# Altium PCB M_ST_Link.PcbDoc
Units mil, origin at the board's own origin, x right, y up, seen from the top; angles counter-clockwise.
Board outline 80.7 x 10.03 mil, 2 copper layers (Top Layer, Bottom Layer), stack 62.8 mil thick; 23 components, 23 nets, 123 pads, 27 vias.
Unrouted connection lines stored in the file: 4.
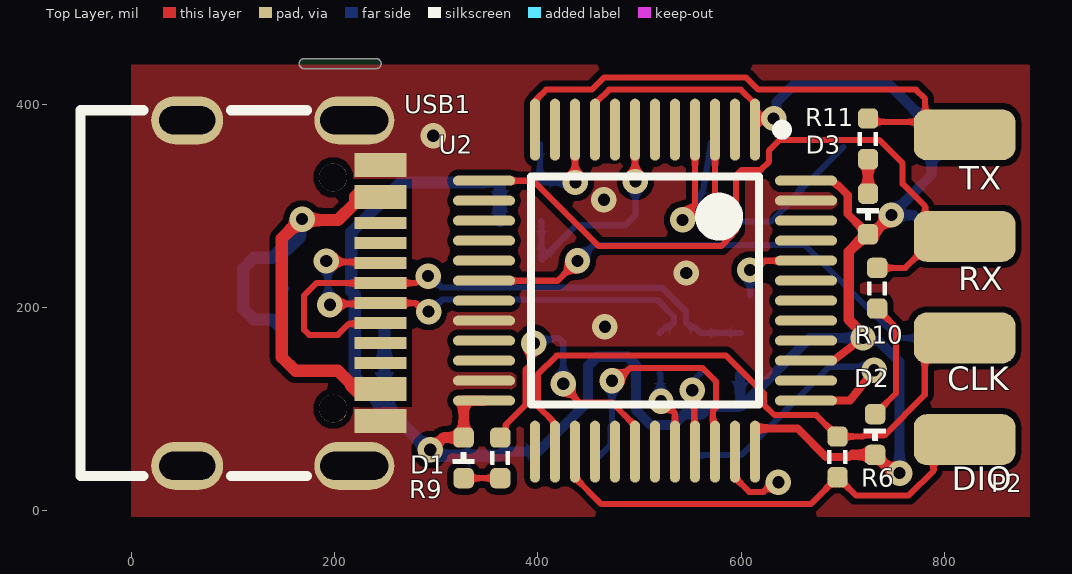
[diagram p0: Top Layer view]
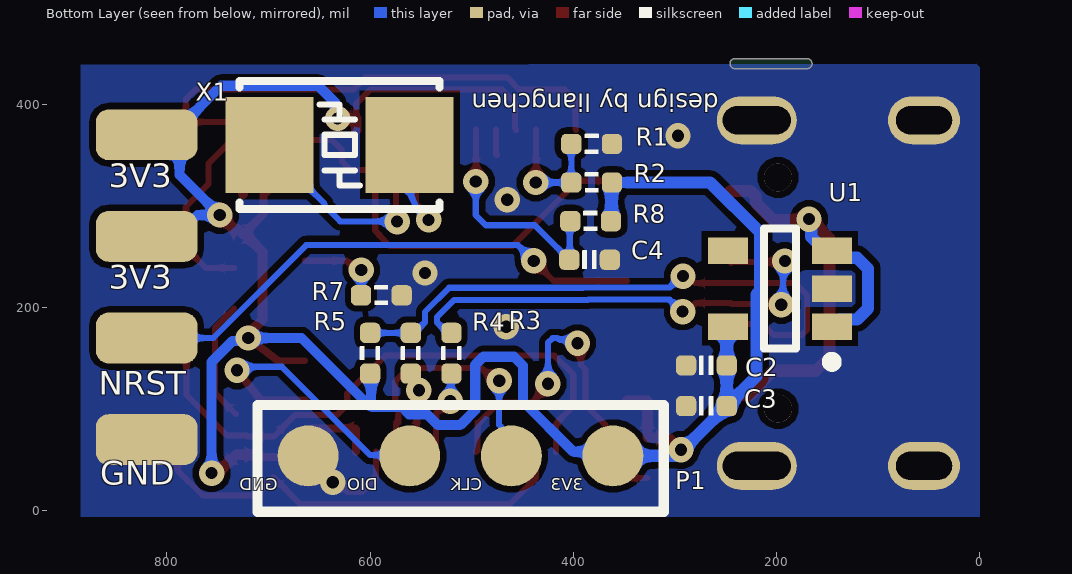
[diagram p1: Bottom Layer view, seen from below]

## Layer stack, top to bottom
Top Solder: solder mask 0.4, Solder Resist, Dk 3.5
Top Layer: signal copper 1.4
Dielectric 1: dielectric 60, FR-4, Dk 4.8
Bottom Layer: signal copper 1.4
Bottom Solder: solder mask 0.4, Solder Resist, Dk 3.5

## Board outline
170.06,434.99 cw(c170.06,440) 170.06,445.01 240.75,445.01 cw(c240.75,440) 245.76,440 cw(c240.75,440) 240.75,434.99

## Design rules (kind name [scope] priority, off if disabled: settings)
Clearance [All] p1: gap=6 ignorepadtopadclearanceinfootprint=FALSE except(0: Arc-Hole Track-Hole SMDPad-Hole THPad-Hole Via-Hole Fill-Hole Poly-Hole Region-Hole Text-Hole)
DiffPairsRouting DiffPair_90DiffPairsRouting [InDifferentialPairClass('90oum')] p1: maxlimit=6 minlimit=6 mostfreqgap=6 toplayer_minwidth=6 toplayer_maxwidth=6 toplayer_prefwidth=6 bottomlayer_minwidth=6 bottomlayer_maxwidth=6 bottomlayer_prefwidth=6 maxuncoupledlength=500
DiffPairsRouting [All] p2: maxlimit=6 minlimit=6 mostfreqgap=6 toplayer_minwidth=6 toplayer_maxwidth=6 toplayer_prefwidth=6 bottomlayer_minwidth=6 bottomlayer_maxwidth=6 bottomlayer_prefwidth=6 maxuncoupledlength=500
MatchedLengths DiffPair_90MatchedLengths [InDifferentialPairClass('90oum')] p1: tolerance=10 checknetsindiffpair=FALSE checkdiffpairvsdiffpair=TRUE checkxsignals=TRUE checkothers=TRUE
PolygonConnect [All] p1: connectstyle=Direct reliefconductorwidth=10 reliefentries=4 polygonreliefangle="90 Angle" airgapwidth=10
RoomDefinition Main [InComponentClass('Main')] p1: confinementstyle=ConfineIn formatcopy=TRUE lockcomponents=FALSE outline -2900,-2475 -900,-2475 -900,-1475 -2900,-1475
RoutingVias [All] p1: holewidth=28 width=50 viastyle="Through Hole" minholewidth=28 minwidth=50 maxholewidth=28 maxwidth=50
SolderMaskExpansion [All] p1: expansion=4 istentingtop=FALSE
Width [All] p1: maxlimit=50 minlimit=6 preferedwidth=10 minimp=50.000000 maximp=50.000000 favimp=50.000000
29 further rules are at their usual default settings.

## Components (designator, comment, footprint, x,y, rotation, side; value= is the part's Value field where it differs from the comment)
C2 "0.1uF" CAP_0402 269,143 r180 bottom value=0.1u
C3 "0.1uF" CAP_0402 269,103 r180 bottom value=0.1u
C4 "0.1uF" CAP_0402 384,247 r0 bottom value=0.1u
D1 "color?" LED_0402_BLUE 327,52 r90 top
D2 "color?" LED_0402_BLUE 732,75 r270 top
D3 "color?" LED_0402_BLUE 725,292 r270 top
P1 "Header 4" TP-2.54-4P 361,54 r180 bottom
P2 "Header 4X2" HDR2X4_2.54_180H 820,370 r0 top
R1 "10K" RES_0402 382,361 r0 bottom value=22R
R2 "10K" RES_0402 382,323 r180 bottom value=22R
R3 "22R" RES_0402 520,155 r270 bottom
R4 "22R" RES_0402 560,155 r270 bottom
R5 "1.5K" RES_0402 600,155 r90 bottom value=22R
R6 "100R" RES_0402 695,53 r90 top value=22R
R7 "10K" RES_0402 589,212 r180 bottom value=22R
R8 "10K" RES_0402 383,285 r180 bottom value=22R
R9 "2K" RES_0402 363,52 r270 top value=22R
R10 "680R" RES_0402 734,219 r270 top value=22R
R11 "680R" RES_0402 725,366 r270 top value=22R
U1 "MIC5504-3.3YM5-TR" MCHP-SOT-23-M5_V 196.82,218.6 r0 bottom
U2 "STM32F103CBT6" STM-LQFP48_L 505.47,216.54 r270 top
USB1 "KH-TYPE-C-16P" TYPE-C-SMD-16P-TOP 149.92,214.2 r270 top
X1 "XTAL-2P" "OSC 5032-2P" 630,360 r0 bottom

## Footprints (in the part's own frame and the unit in brackets; to place one, negate y for a bottom-side part, rotate by r counter-clockwise, add the part's x,y. Pads: shape width x height; smd on the part's side, far side on the other; paste and mask are expansions set on the pad)
CAP_0402 [mil]
  rrect50% 20x20 smd: 1(-20,0) 2(20,0)
  silkscreen extent -7,-9 7,9, body extent -20,-10 20,10, height 20
HDR2X4_2.54_180H [mil]
  rrect50% 100x50 smd: 1(0,0) 3(0,-100) 5(0,-200) 7(0,-300)
  rrect50% 100x50 smd far side: 2(0,0) 4(0,-100) 6(0,-200) 8(0,-300)
  body extent -38,-350 415,50, height 100
LED_0402_BLUE [mil]
  rrect50% 20x20 smd: 1(-20,0) 2(20,0)
  silkscreen extent -6,-10 6,10, body extent -20,-10 20,10, height 18
MCHP-SOT-23-M5_V [mm] "SOT-23, 5-Leads, Body 3x1.7mm, Pitch 0.95mm"
  rect 1x0.66 smd: 1(-1.3,0.95) 2(-1.3,0) 3(-1.3,-0.95) 4(1.3,-0.95) 5(1.3,0.95)
  silkscreen extent -1.42,-1.5 0.4,1.95, body extent -1.5,-1.5 1.5,1.5, height 1.45
"OSC 5032-2P" [mm]
  rect 2.2x2.4 smd: 1(-1.75,0) 2(1.75,0)
  silkscreen extent -2.5,-1.6 2.5,1.6, body extent -2.5,-1.52 2.5,1.68, height 0.86
RES_0402 [mil]
  rrect50% 20x20 smd: 1(-20,0) 2(20,0)
  silkscreen extent -6,-10 6,10, body extent -20,-10 20,10, height 14
STM-LQFP48_L [mm] "QFP, 48-Leads, Body 7x7mm, Pitch 0.5mm, IPC High Density"
  oval 1.55x0.25 smd: 1(-4.025,2.75) 2(-4.025,2.25) 3(-4.025,1.75) 4(-4.025,1.25) 5(-4.025,0.75) 6(-4.025,0.25) 7(-4.025,-0.25) 8(-4.025,-0.75) 9(-4.025,-1.25) 10(-4.025,-1.75) 11(-4.025,-2.25) 12(-4.025,-2.75) 25(4.025,-2.75) 26(4.025,-2.25) 27(4.025,-1.75) 28(4.025,-1.25) 29(4.025,-0.75) 30(4.025,-0.25) 31(4.025,0.25) 32(4.025,0.75) 33(4.025,1.25) 34(4.025,1.75) 35(4.025,2.25) 36(4.025,2.75)
  oval 0.25x1.55 smd: 13(-2.75,-4.025) 14(-2.25,-4.025) 15(-1.75,-4.025) 16(-1.25,-4.025) 17(-0.75,-4.025) 18(-0.25,-4.025) 19(0.25,-4.025) 20(0.75,-4.025) 21(1.25,-4.025) 22(1.75,-4.025) 23(2.25,-4.025) 24(2.75,-4.025) 37(2.75,4.025) 38(2.25,4.025) 39(1.75,4.025) 40(1.25,4.025) 41(0.75,4.025) 42(0.25,4.025) 43(-0.25,4.025) 44(-0.75,4.025) 45(-1.25,4.025) 46(-1.75,4.025) 47(-2.25,4.025) 48(-2.75,4.025)
  silkscreen extent -4.15,-2.85 2.85,3.55, body extent -3.5,-3.5 3.5,3.5, height 1.6
TP-2.54-4P [mil] "Connector; Header; 4 Position"
  round 60 smd: 1(0,0) 2(-100,0) 3(-200,0) 4(-300,0)
  silkscreen extent -350,-55 50,50
TYPE-C-SMD-16P-TOP [mm]
  oval 1.2x2 hole 0.7 slot 1.7 at 90 deg: 1(-4.32,1.765) 2(4.32,1.765)
  oval 1.2x1.8 hole 0.7 slot 1.4 at 90 deg: 3(-4.32,-2.415) 4(4.32,-2.415)
  rect 0.3x1.3 smd: A1(-3.35,2.415) A4(-2.55,2.415) A5(-1.25,2.415) A6(-0.25,2.415) A7(0.25,2.415) A8(1.25,2.415) A9(2.55,2.415) A12(3.35,2.415) B1(3.05,2.415) B4(2.25,2.415) B5(1.75,2.415) B6(0.75,2.415) B7(-0.75,2.415) B8(-1.75,2.415) B9(-2.25,2.415) B12(-3.05,2.415)
  round 0.7 hole 0.7 unplated: ""(-2.89,1.235) ""(2.89,1.235)
  silkscreen extent -4.57,-5.08 4.57,0.57, body extent -4.47,-5.01 4.47,2.89, height 3.13

## Part data
C2 C3 C4: library part 电容-0402, "Capacitor"
D1 D2 D3: library part LED_0402, "LED", Type=0402
P1: "Header, 4-Pin", LatestRevisionDate=17-Jul-2002, LatestRevisionNote="Re-released for DXP Platform.", Publisher="Altium Limited"
P2: "Header, 4-Pin, Dual row", LatestRevisionDate=17-Jul-2002, LatestRevisionNote="Re-released for DXP Platform.", Publisher="Altium Limited"
R1 R2 R3 R4 R5 R6 R7 R8 R9 R10 R11: library part 电阻-0402, "Resistor"
U1: library part CMP-2000-07604-1, "Single LDO, 2.5 to 5.5 V, Fixed Out 3.3 V, 0.3 A, -40 to 125 degC, 5-Pin SOT-23 (M5), RoHS, Tape and Reel", Case\/Package=SOT-23, Dropout Voltage=160mV, Manufacturer=Microchip, Max Input Voltage=5.5V, Max Operating Temperature=125degC, Min Current Limit=400mA, Min Input Voltage=2.5V, Min Operating Temperature=-40degC, Nominal Output Voltage=3.3V, Output Current=300mA, Package Description="5-Pin Small Outline Transistor, Body 1.6 x 2.9 mm, Pitch 0.95 mm", Datasheet URL=http://ww1.microchip.com/downloads/en/DeviceDoc/MIC550X.pdf, Datasheet Version="Rev. 2.3, 04/2015", Lead Free=LeadFree, Manufacturer URL=http://www.microchip.com/, Mount=SurfaceMount, Mounting Technology=SurfaceMount, Number of Pins=5, Number of Regulators=1, Output Voltage=3.3V, Package Reference=SOT-23, Packaging=CutTape, REACH SVHC=NoSVHC, RoHSCompliant=True
U2: library part CMP-0237-00250-3, "ARM Cortex-M3 32-bit MCU, 128 KB Flash, 20 KB Internal RAM, 37 I/Os, 48-pin LQFP, -40 to 85 degC, Tray", I/Os (High Current)=37, Operating Frequency(F) (Processor speed) (MHz)=72, Supply Voltage(Vcc) min (V)=2, A/D Converter="2x12-bit (10 Channel)", ComponentLink1Description="Manufacturer URL", ComponentLink1URL=http://www.st.com/web/en/home.html, ComponentLink2Description=Datasheet, ComponentLink2URL=http://www.st.com/st-web-ui/static/active/en/resource/technical/document/datasheet/CD00161566.pdf, ComponentLink3Description="Package Specification", ComponentLink3URL=http://www.st.com/st-web-ui/static/active/en/resource/technical/document/datasheet/DM00058181.pdf, Core="ARM Cortex-M3", DatasheetVersion="Rev. 16", FLASH Size (Prog) (kB)=128, Internal RAM Size (kB)=20, Mounting Technology="Surface Mount", PackageDescription="48-Pin Low Profile Quad Flat Package, 7 x 7 mm Body, 0.5 mm Pitch", PackageReference=LQFP48, PackageVersion="Rev. 6, 06/2013", Packing=Tray, PartNumber=STM32F103CBT6
USB1: BOM_JLCPCB Part Class="Extended Part", BOM_Manufacturer="Shenzhen Kinghelm Elec", BOM_Manufacturer Part=KH-TYPE-C-16P, BOM_Supplier=LCSC, BOM_Supplier Part=C709357, Contributor=LCSC, spicePre=U, spiceSymbolName=KH-TYPE-C-16P
X1: "2脚无源脚晶振"

## Via types
v1: diameter 25, hole 12, Top Layer to Bottom Layer, 27 vias

## Nets (pads, with @x,y where several pads share a name; then routed paths per layer and width w, separated by ;. In a path a pad name is that pad's centre, name@x,y a point inside that pad or via, vN(x,y) a via of type N, cw(c..) or ccw(c..) an arc to the next point about the centre after c; other vN are vias at no path point)
3V3: C2.2 C3.2 D1.2 D2.2 D3.2 P1.1 P2.2 P2.4 R2.2 R5.1 R8.2 U1.5 U2.1 U2.9 U2.24 U2.36 U2.39 U2.48 | length 2448.5
  Top Layer w6: U2.9 457.51,376.25 457.51,401.85 470.18,414.51 599.82,414.51 613.74,400.59 U2.1@613.74,385.92
  Top Layer w8: U2.36 613.74,80.15 614.59,81 655.79,81 683.79,53 706.21,53 708.21,55 709.63,55 ; U2.48 690.03,324.8 694.79,320.04 695.71,320.04 705,310.75 705,292 724,273 D3.2
  Top Layer w10: v1(294,60) 294.79,60 306.79,72 D1.2 327,108.19 327.08,108.27 U2.24 ; U2.1 613.74,385.92 613.82,386 v1(632,386) ; 709.63,55 D2.2 v1@747.13,39.87 ; v1(720,170) 720,174.06 706,188.06 706,255 724,273 724.99,273.99 D3.2@726.93,273.99 ; D3.2 730,277 734,277 v1(748,291)
  Bottom Layer w10: 347,323 R2.2 ; P1.1 365.14,58.14 400.14,58.14 449.5,107.5 449.5,142.64 458.36,151.5 488.5,151.5 496.5,143.5 496.5,99.18 511.44,84.25 533.26,84.25 544.02,95 561.7,95 568.7,102 598,102 599,103 ; R5.1 599,134 599,103 ; v1(632,386) 634.84,388.84 634.84,402.05 651.03,418.24 746.76,418.24 795.01,370 806.93,370 787.5,350.57 787.5,330.5 768.48,311.48 v1(748,291) 769.94,291 790.94,270 P2.4 ; v1(756,37) 756,146.48 735.35,167.13 722.87,167.13 v1(720,170) 667.63,170 600.63,103 599,103
  Bottom Layer w12: U1.5 249,180.2 C2.2 C3.2 ; 347,323 265.35,323 216.31,273.96 216.31,216.36 219.77,212.9 219.77,132.23 C3.2 ; P1.1 298,54 C3.2 ; R2.2 362.5,322.5 362.5,285.5 R8.2
5V: U1.1 U1.3 USB1.A4 USB1.A9 USB1.B4 USB1.B9 | length 522.5
  Top Layer w12: v1(168,287) 167,287 v1@166,286 ; USB1.A9 225.5,113.8 215.45,123.84 215.45,125.62 203.41,137.66 161.34,137.66 148,151 148,268 v1@166,286 ; USB1.A4 225.51,314.59 220.19,309.27 220.19,302.78 203.41,286 v1@166,286
  Bottom Layer w12: U1.1 138.65,188.19 120.74,188.19 109.95,198.98 109.95,238.22 120.74,249.01 138.65,249.01 U1.3 152.33,256 165.84,269.51 165.84,284.84 v1(168,287)
GND: C2.1 C3.1 C4.1 P1.4 P2.8 R1.1 R7.2 U1.2 U2.8 U2.20 U2.23 U2.35 U2.47 USB1.1 USB1.2 USB1.3 USB1.4 USB1.A1 USB1.A12 USB1.B1 USB1.B12 | length 110.1
  Top Layer w6: U2.8@475,350 475.94,350.94 U2.8 ; U2.35 594.06,32.48 607.97,18.56 622.1,18.56 631.6,28.06 v1(636.74,28.06)
  Bottom Layer w6: U1.2 U1.2@152.33,218.6
  other v1: 466,181 546,234 465,306 297,369
JTCK: P2.5 R6.2 U2.26 | length 610.5
  Top Layer w6: U2.26 416.89,84.7 414.97,86.62 414.97,88.03 400.1,102.9 400.1,134.1 418.58,152.58 585.32,152.58 622.5,115.41 622.5,104.43 632.93,94 674,94 R6.2 720.2,73 721.2,74 740.8,74 780.8,114 780.8,148.72 802.07,170 P2.5
JTMS: P2.7 R6.1 U2.27 | length 466.3
  Top Layer w6: U2.27 436.57,32.48 462.49,6.56 668.56,6.56 R6.1 713,15 765,15 789.51,39.51 789.51,48.72 810.79,70 P2.7
LED_RUN: R9.1 U2.30 | length 294.7
  Top Layer w6: R9.1 368.41,77.41 368.41,84.39 388.1,104.08 388.1,139.07 392.44,143.41 392.44,161.45 v1(395.89,164.91) ; v1(425,125) 425,122.65 441.15,106.5 472.79,106.5 494.38,84.92 494.38,59.32 U2.30
  Bottom Layer w6: v1(395.89,164.91) 399.53,168.54 414.01,168.54 415.42,169.96 420.39,169.96 425,165.35 v1(425,125)
NetC4_2: C4.2 R8.1 U2.7 | length 232.8
  Top Layer w6: U2.7 495.63,324.37 v1(496,324)
  Bottom Layer w6: R8.1 403.5,284.5 403.5,247.5 C4.2 438,281 486,281 496,291 v1(496,324)
NetD1_1: D1.1 R9.2 | length 36
  Top Layer w6: D1.1 R9.2
NetD2_1: D2.1 R10.2 | length 120.1
  Top Layer w6: D2.1 752.49,115.49 752.49,180.51 R10.2
NetD3_1: D3.1 R11.2 | length 34
  Top Layer w10: D3.1 R11.2
NetR1_2: R1.2 R2.1 U2.10 | length 125.2
  Top Layer w6: U2.10 436.57,323.43 v1(437,323)
  Bottom Layer w6: R1.2 R2.1 v1(437,323)
NetR3_2: R3.2 U2.32 | length 84.2
  Top Layer w6: v1(521.17,107.75) 522.96,107.75 535,95.71 U2.32
  Bottom Layer w6: R3.2 520.59,134.41 520.59,108.33 v1(521.17,107.75)
NetR4_2: R4.2 U2.33 | length 81.4
  Top Layer w6: v1(551.96,118.5) 553.95,116.51 553.95,58.81 U2.33
  Bottom Layer w6: v1(551.96,118.5) 555.6,122.14 555.6,130.6 R4.2
NetR7_1: R7.1 U2.44 | length 84.1
  Top Layer w6: v1(608.7,236.89) 613.84,236.89 623.02,246.06 U2.44
  Bottom Layer w6: v1(608.7,236.89) 608.85,236.74 608.85,212.15 R7.1
NetU2_3: U2.3 X1.2 | length 250.7
  Top Layer w6: v1(573.43,284.57) 575.36,286.5 575.36,298.78 574.37,299.77 U2.3
  Bottom Layer w6: v1(573.43,284.57) 573.65,284.78 629.62,284.78 644.87,300.03 644.87,302.03 X1.2@700.9,358.06
NetU2_4: U2.4 X1.1 | length 179.5
  Top Layer w6: v1(542.48,286.26) 542.48,289.55 554.68,301.75 U2.4
  Bottom Layer w6: v1(542.48,286.26) 542.74,286 548,286 562.94,316.22 X1.1@570.2,362
NRST: P2.6 U2.18 | length 525.2
  Top Layer w6: U2.18 419.52,226.38 v1(439,245.86)
  Bottom Layer w6: v1@439.14,246 454.6,261.46 662.95,261.46 754.41,170 P2.6
SW_CLK: P1.2 U2.34 | length 263.3
  Top Layer w6: v1(473,128) 478.14,128 490.72,140.58 561.91,140.58 575.27,127.21 575.27,101.54 572.21,98.48 572.21,86.86 574.37,84.7 U2.34
  Bottom Layer w6: P1.2 471.33,64.33 471.33,82.85 473,84.51 v1(473,128)
SW_DIO: P1.3 U2.37 | length 234.4
  Top Layer w6: 663.94,147.64 690.57,147.64
  Bottom Layer w6: P1.3 561.76,54.76 600,54.76 686.92,141.69 727.55,141.69 v1(730.99,138.25)
USART_RX: P2.3 R10.1 U2.13 | length 718.9
  Top Layer w6: U2.13 395.6,324.8 459.91,260.5 580.57,260.5 591,270.93 591,271.73 594.93,275.66 594.93,329.93 600.49,335.49 619.51,335.49 627.66,343.64 627.66,354.66 638,365 735.8,365 759,341.8 759,321.79 781.19,299.6 781.19,291.28 P2.3@802.47,270 ; R10.1 761.75,239 792.75,270 P2.3@802.47,270 ; P2.3 P2.3@802.47,270
USART_TX: P2.1 R11.1 U2.12 | length 576
  Top Layer w6: U2.12 397.94,375.74 397.94,404.21 408.24,414.51 453.21,414.51 465.21,426.51 604.79,426.51 616.79,414.51 771.97,414.51 781.09,405.39 781.09,399.7 781.19,399.6 781.19,391.28 798.72,391.28 P2.1@807.25,382.75 ; R11.1 728.25,382.75 P2.1@807.25,382.75 ; P2.1 P2.1@807.25,382.75
USB_D+: R4.1 R5.2 USB1.A6 USB1.B6 | length 583.1
  Top Layer w6: USB1.B6 244.24,183.91 214.02,183.91 203.16,173.04 174.96,173.04 169.98,178.02 169.98,211.99 182.25,224.26 208.71,224.26 208.93,224.04 USB1.A6 279.97,224.04 286.87,230.94 v1(292.01,230.94)
  Bottom Layer w6: v1(292.01,230.94) 293.85,230.94 305.03,219.76 345.35,219.76 390.21,219.76 390.52,219.44 516.61,219.44 522.33,219.44 546,195.77 546,185.51 550.75,180.77 554.23,180.77 R4.1 R5.2
USB_D-: R3.1 USB1.A7 USB1.B7 | length 476.9
  Top Layer w6: v1(191.81,245.76) 192.83,244.74 243.99,244.74 USB1.B7 ; v1(195.27,202.76) 196.07,203.56 244.2,203.56 USB1.A7 279.59,204.36 288.01,195.94 v1(292.44,195.94)
  Bottom Layer w6: v1(191.81,245.76) 193.54,244.03 193.54,204.48 v1(195.27,202.76) ; v1(292.44,195.94) 293.64,195.94 305.46,207.76 345.35,207.76 385.24,207.76 385.55,207.44 516.61,207.44 517.36,207.44 534,190.8 534,185.51 529.25,180.77 525.77,180.77 R3.1
pads on no net: U1.4 U2.2 U2.5 U2.6 U2.11 U2.14 U2.15 U2.16 U2.17 U2.19 U2.21 U2.22 U2.25 U2.28 U2.29 U2.31 U2.38 U2.40 U2.41 U2.42 U2.43 U2.45 U2.46 USB1. USB1.A5 USB1.A8 USB1.B5 USB1.B8
copper on no net: | length 118.4
  Top Layer w7.87: 663.94,108.27 707,108.27 730.99,138.25 ; 690.57,147.64 720,170

## Polygon pours and split planes (outlines as drawn)
GND on Top Layer "GND_L01_P000" (solid, pour order 0): 0,439 0,-6 884,-6 884,440 883,439
GND on Bottom Layer "GND_L02_P001" (solid, pour order 1): 0,440 0,-6 885,-6 885,439

## Silkscreen, mask and mechanical layers (free items; w line width, h text height)
Top Overlay:
  text "TX" at 814.69,308 h40
  text "RX" at 813.69,209.33 h40
  text "CLK" at 803.13,110.44 h40
  text "DIO" at 807.38,12.44 h40
Bottom Overlay:
  text "design by liangchen" at 257,416.35 h30 r180
  text "3V3" at 857.27,310.44 h40
  text "3V3" at 857.27,210.44 h40
  text "NRST" at 866.95,106.44 h40
  text "GND" at 865.85,17.44 h40
  text "3V3" at 390.16,16.34 h20
  text "CLK" at 489.48,16.17 h20
  text "DIO" at 592.4,16.17 h20
  text "GND" at 691.07,16.17 h20
Mechanical 1:
  lines w10: 0,-6 0,440 64.69,440 170.06,440 240.75,440 779.2,440 885,440 885,-6 0,-6

## Dimensions
0,-6 to 885,-6 on Mechanical 1